# EAGLE board LcdModule-16x2_1V0 (EAGLE 7.2.0)
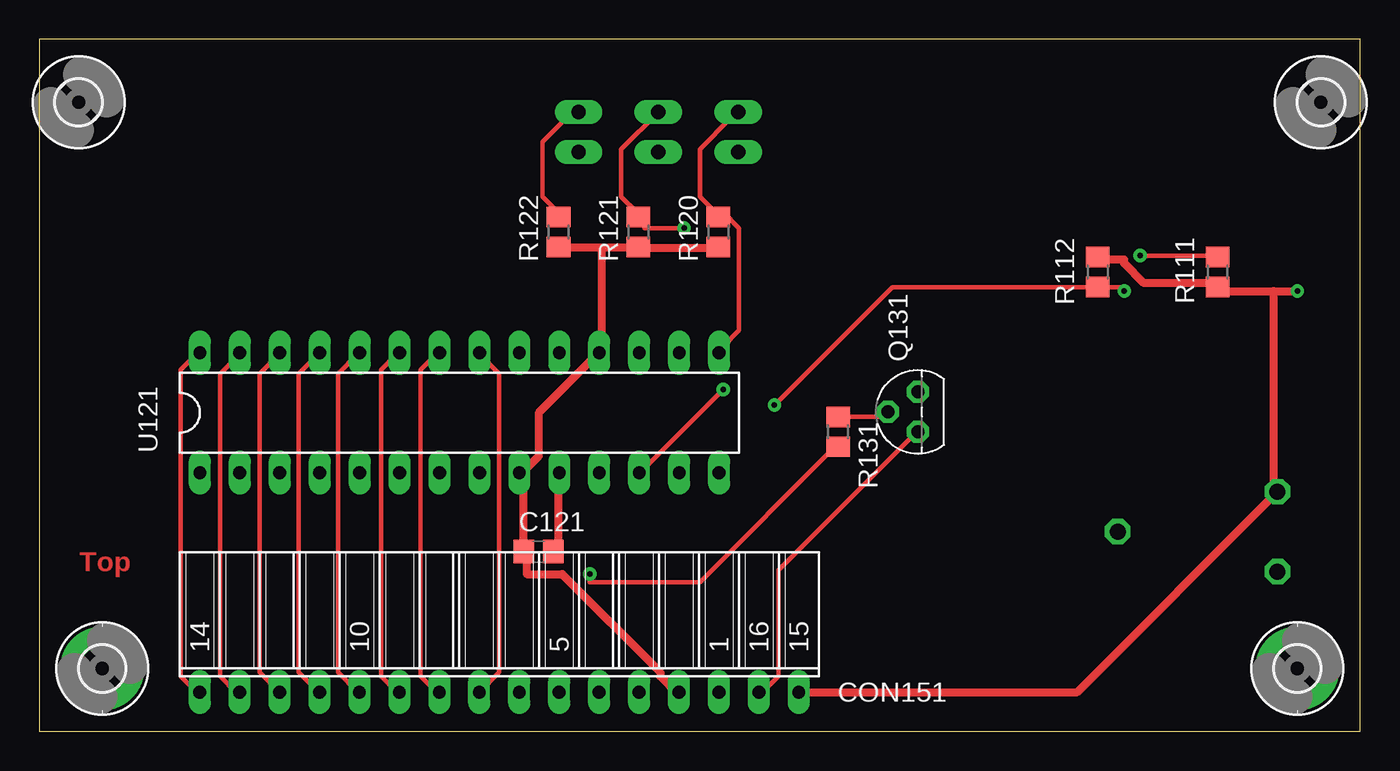
[diagram p0: board, top side]
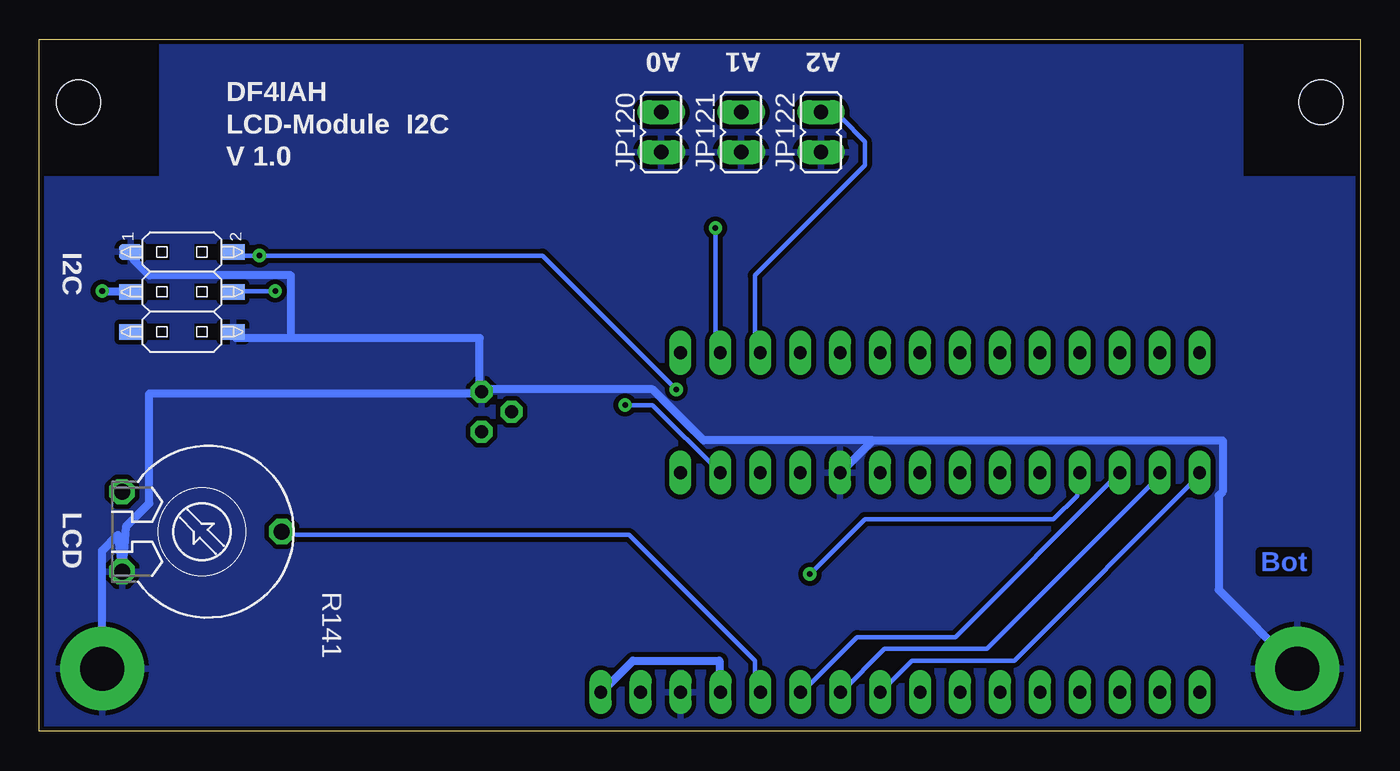
[diagram p1: board, bottom side, seen from below]

Size 84 x 44 mm. Coordinates in mm from the lower left corner, seen from the top.
Outline: 0,0 84,0 84,44 0,44 0,0
Copper layers (1*16): Top 0.035mm / dielectric 1.5mm / Bottom 0.035mm
Design rules "HSMA_20150114": minimum track width 0.3mm, minimum drill 0.35mm, track to track 0.3mm, track to pad 0.3mm, pad to pad 0.3mm, via to via 0.3mm, smd to smd 0mil, copper to edge 0.3mm, drill to drill 0.35mm, minimum pad ring 0.3mm, minimum via ring 0.25mm, stop-mask expansion 0mil, vias tented up to drill 0.45mm, thermal gap 0.3mm
Net classes: 1 N3V3: width 0.508 mm; 2 N5V: width 0.508 mm; 3 N0V: width 0.508 mm

## Footprints (pad centres in the part's own frame; a part is rotated, then mirrored left to right if it is on the bottom)
C0805 = smd 1.3 x 1.5: 1 -0.95,0; 2 0.95,0
2X03SMD = smd 1 x 1.5: 1 -2.54,-3.25; 2 -2.54,3.25; 3 0,-3.25; 4 0,3.25; 5 2.54,-3.25; 6 2.54,3.25
CON_LCDBRD_16W = drill 0.813 long: 1 33.02,0; 2 30.48,0; 3 27.94,0; 4 25.4,0; 5 22.86,0; 6 20.32,0; 7 17.78,0; 8 15.24,0; 9 12.7,0; 10 10.16,0; 11 7.62,0; 12 5.08,0; 13 2.54,0; 14 0,0; 15 38.1,0; 16 35.56,0
2,8-PAD = drill 2.8 pad 5.334: B2,8 0,0
2,8 = hole 2.8: 0,0
JP1 = drill 0.914 long: 1 0,-1.27; 2 0,1.27
TO92 = drill 0.813 octagon: 1 1.27,0; 2 0,1.905; 3 -1.27,0
R0805 = smd 1.3 x 1.5: 1 -0.95,0; 2 0.95,0
PT-10 = drill 1.016 octagon: A -2.54,-5.08; E 2.54,-5.08; S 0,5.08
DIL28-3 = drill 0.813 long: 1 -16.51,-3.81; 2 -13.97,-3.81; 3 -11.43,-3.81; 4 -8.89,-3.81; 5 -6.35,-3.81; 6 -3.81,-3.81; 7 -1.27,-3.81; 8 1.27,-3.81; 9 3.81,-3.81; 10 6.35,-3.81; 11 8.89,-3.81; 12 11.43,-3.81; 13 13.97,-3.81; 14 16.51,-3.81; 15 16.51,3.81; 16 13.97,3.81; 17 11.43,3.81; 18 8.89,3.81; 19 6.35,3.81; 20 3.81,3.81; 21 1.27,3.81; 22 -1.27,3.81; 23 -3.81,3.81; 24 -6.35,3.81; 25 -8.89,3.81; 26 -11.43,3.81; 27 -13.97,3.81; 28 -16.51,3.81

## Placement (x,y rotation side)
C121  470nF  [C0805]  31.75,11.43 0 top
CON101  HEADER-2X3SMD  [2X03SMD]  74.93,27.94 270 bottom
CON151  [CON_LCDBRD_16W]  10.2,2.5 0 top
H901  MOUNT-PAD-ROUND2.8  [2,8-PAD]  4,4 0 top
H902  MOUNT-PAD-ROUND2.8  [2,8-PAD]  80,4 0 top
H903  MOUNT-HOLE2.8  [2,8]  81.5,40 0 top
H904  MOUNT-HOLE2.8  [2,8]  2.5,40 0 top
JP120  [JP1]  44.45,38.1 0 bottom
JP121  [JP1]  39.37,38.1 0 bottom
JP122  [JP1]  34.29,38.1 0 bottom
Q131  BC337  [TO92]  55.88,20.32 90 top
R111  1.5k  [R0805]  74.93,29.21 270 top
R112  1.5k  [R0805]  67.31,29.21 90 top
R120  100k  [R0805]  43.18,31.75 270 top
R121  100k  [R0805]  38.1,31.75 270 top
R122  100k  [R0805]  33.02,31.75 270 top
R131  15k  [R0805]  50.8,19.05 270 top
R141  10k  [PT-10]  73.66,12.7 270 bottom
U121  MCP23017SP  [DIL28-3]  26.72,20.27 0 top

## Library data of the parts
C121 R111 R112 R120-R122 R131 = rcl
CON101 = df4iah
CON151 = df4iah_connector; OC_FARNELL: unknown; OC_NEWARK: unknown
H901-H904 = holes
JP120-JP122 = jumper
Q131 = transistor-npn
R141 = pot
U121 = microchip; MF: MICROCHIP; MPN: MCP23017-E/SP; OC_FARNELL: 1332088; OC_NEWARK: 31K2959

## Nets
A0: JP120.2 R120.1 U121.15
A1: JP121.2 R121.1 U121.16
A2: JP122.2 R122.1 U121.17
DB0: CON151.7 U121.21
DB1: CON151.8 U121.22
DB2: CON151.9 U121.23
DB3: CON151.10 U121.24
DB4: CON151.11 U121.25
DB5: CON151.12 U121.26
DB6: CON151.13 U121.27
DB7: CON151.14 U121.28
E: CON151.6 U121.1
GND [N0V]: C121.2 CON101.1 CON101.6 CON151.1 H901.B2,8 H902.B2,8 JP120.1 JP121.1 JP122.1 Q131.1 R141.E U121.10
LED: R131.2 U121.4
LED_K: CON151.16 Q131.3
N$4: Q131.2 R131.1
R/W: CON151.5 U121.2
RS: CON151.4 U121.3
SCL: CON101.2 R111.1 U121.12
SDA: CON101.4 R112.1 U121.13
V0: CON151.3 R141.S
VCC [N5V]: C121.1 CON101.3 CON151.2 CON151.15 R111.2 R112.2 R120.2 R121.2 R122.2 R141.A U121.9 U121.18

## Tracks (layer width: path | path; a pad name or v marks a point on that pad's centre or on a via)
A0
  Top 0.3: JP120.2 44,39 42,37 42,34 43,33 R120.1 43.5,33 44.5,32 44.5,25.5 43.5,24.5 U121.15
A1  (via drill 0.35)
  Top 0.3: JP121.2 37,37 37,34 38,33 R121.1 38.5,32.5 38.5,32 v41,32
  Bottom 0.3: v41,32 41,24.5 U121.16
A2
  Top 0.3: R122.1 33,33 32,34 32,37.5 34,39.5 JP122.2
  Bottom 0.3: U121.17 38.5,24.5 38.5,29 31.5,36 31.5,37.5 33,39 34,39 JP122.2
DB0
  Top 0.3: CON151.7 28,2.5 29.25,3.75 29.25,22.75 28,24 U121.21
DB1
  Top 0.3: CON151.8 25.25,2.5 24.25,3.5 24.25,23 25.25,24 U121.22
DB2
  Top 0.3: CON151.9 22.75,2.5 21.75,3.5 21.75,23 22.75,24 U121.23
DB3
  Top 0.3: CON151.10 20.25,2.5 19,3.75 19,22.75 20.25,24 U121.24
DB4
  Top 0.3: CON151.11 17.75,2.5 16.5,3.75 16.5,22.75 17.75,24 U121.25
DB5
  Top 0.3: CON151.12 15.25,2.5 14,3.75 14,22.75 15.25,24 U121.26
DB6
  Top 0.3: CON151.13 12.5,2.5 11.5,3.5 11.5,22.75 12.75,24 U121.27
DB7
  Top 0.3: CON151.14 10,2.5 9,3.5 9,23 10,24 U121.28
E
  Bottom 0.3: U121.1 10.25,16.25 22,4.5 28.5,4.5 30.5,2.5 CON151.6
GND
  Top 0.508: C121.2 33,11.5 33,16 U121.10
  Bottom 0.508: H901.B2,8 9,9 9,15 8.75,15.25 8.75,18.5 31,18.5 | 31,18.5 33,16.5 U121.10 | 31,18.5 41.75,18.5 45,21.75 55.75,21.75 Q131.1 | 68,25 56,25 56,22 Q131.1 | 68,25 71.5,25 CON101.6 | 68,25 68,29 77,29 78,30 CON101.1 | H902.B2,8 80,11.5 79,12.5 R141.E 78.5,13 77,14.5 77,21.5 56,21.5 Q131.1
  pour Bottom: 0,0 0,35.11 7.62,35.11 7.62,44 76.2,44 76.2,35.11 83.82,35.11 83.82,0
LED  (via drill 0.35)
  Top 0.3: v35,10 35,9.5 42,9.5 50.5,18 R131.2
  Bottom 0.3: v35,10 31.5,13.5 19.5,13.5 18,15 18,16 U121.4
LED_K
  Top 0.3: CON151.16 46,2.5 47,3.5 47,10.25 55.75,19 Q131.3
N$4
  Top 0.3: R131.1 53.5,20 Q131.2
R/W
  Bottom 0.3: U121.2 12.75,16.25 23.75,5.25 30.25,5.25 33,2.5 CON151.5
RS
  Bottom 0.3: U121.3 15.5,16.25 25.75,6 32,6 35.5,2.5 CON151.4
SCL  (via drill 0.35)
  Top 0.3: v70,30.25 74.75,30.25 R111.1 | v43.5,21.75 38.25,16.5 U121.12
  Bottom 0.3: CON101.2 71.5,30.25 v70,30.25 52,30.25 v43.5,21.75
SDA  (via drill 0.35)
  Top 0.3: v69,28 69,28.25 67.5,28.25 R112.1 67.25,28.25 54.25,28.25 v46.75,20.75
  Bottom 0.3: v69,28 71.5,28 CON101.4 | v46.75,20.75 45,20.75 40.75,16.5 U121.13
V0
  Bottom 0.3: CON151.3 38.5,2.5 38.5,4.5 46.5,12.5 68.5,12.5 R141.S
VCC  (via drill 0.35)
  Top 0.508: R112.2 67.5,30 69,30 69,29.75 70.25,28.5 74.75,28.5 R111.2 75,28 78.5,28 | 35.75,30.75 38,30.75 R121.2 38.25,30.75 43,30.75 R120.2 | 35.75,30.75 33.25,30.75 R122.2 | 35.75,30.75 35.75,24.25 U121.18 35.5,24 31.75,20.25 31.75,17.5 30.75,16.5 U121.9 30.75,16.25 30.75,11.5 C121.1 31,11.25 31,10 33.25,10 39.5,3.75 39.5,3.5 40.5,2.5 CON151.2 | 78.5,28 v80,28 | 78.5,28 78.5,15.5 R141.A 66,2.5 CON151.15
  Bottom 0.508: CON151.2 40.75,2.5 40.75,4.5 46.25,4.5 48.25,2.5 CON151.15 | v80,28 78.5,28 CON101.3

## Text on the board
Top: Top
Bottom: Bot
bPlace: A1 | A0 | I2C | LCD
bNames: A2 | DF4IAH / LCD-Module I2C / V 1.0